# EAGLE board arduino (EAGLE 9.6.2)

Size 139.37 x 143.5 mm. Coordinates in mm from the lower left corner, seen from the top.
Outline: 0,0 139.37,11.43 124.13,143.5 24.13,143.5 0,0
Copper layers (1*16): Top 0.035mm / dielectric 1.5mm / Bottom 0.035mm
Design rules "default": minimum track width 6mil, minimum drill 0.35mm, track to track 6mil, track to pad 6mil, pad to pad 6mil, via to via 6mil, smd to smd 6mil, copper to edge 40mil, drill to drill 6mil, minimum pad ring 10mil, minimum via ring 8mil, stop-mask expansion 4mil, vias tented up to drill 0mil, thermal gap 10mil

## Footprints (pad centres in the part's own frame; a part is rotated, then mirrored left to right if it is on the bottom)
LED5MM = drill 0.813 octagon: A -1.27,0; K 1.27,0
0204/7 = drill 0.813 octagon: 1 -3.81,0; 2 3.81,0
CR1220-THM = drill 2 pad 3.175: +1 -6.604,0; +2 6.604,0 | drill 0.8 pad 3.962 square: - 0,0

## Placement (x,y rotation side)
LED1  BLUE  [LED5MM]  27.94,59.69 0 top
LED2  RED  [LED5MM]  27.94,52.07 0 top
LED3  GREEN  [LED5MM]  27.94,44.45 0 top
R1  220E  [0204/7]  29.21,30.48 0 top
R2  220E  [0204/7]  29.21,25.4 0 top
R3  220E  [0204/7]  29.21,20.32 0 top
U$1  [CR1220-THM]  33.02,10.16 0 top

## Library data of the parts
LED1-LED3 = led
R1-R3 = rcl; SPICEPREFIX: R
U$1 = adafruit

## Nets
N$2: LED3.K R3.1
N$3: LED2.K R2.1
N$4: LED1.K R1.1
N$6: LED1.A LED2.A LED3.A U$1.+1 U$1.+2
N$7: R1.2 R2.2 R3.2 U$1.-

## Tracks (layer width: path | path; a pad name or v marks a point on that pad's centre or on a via)
N$2  (1 unrouted)
N$3  (1 unrouted)
N$4  (1 unrouted)
N$6  (4 unrouted)
N$7  (3 unrouted)